# EAGLE board biglcd (EAGLE 7.7.0)
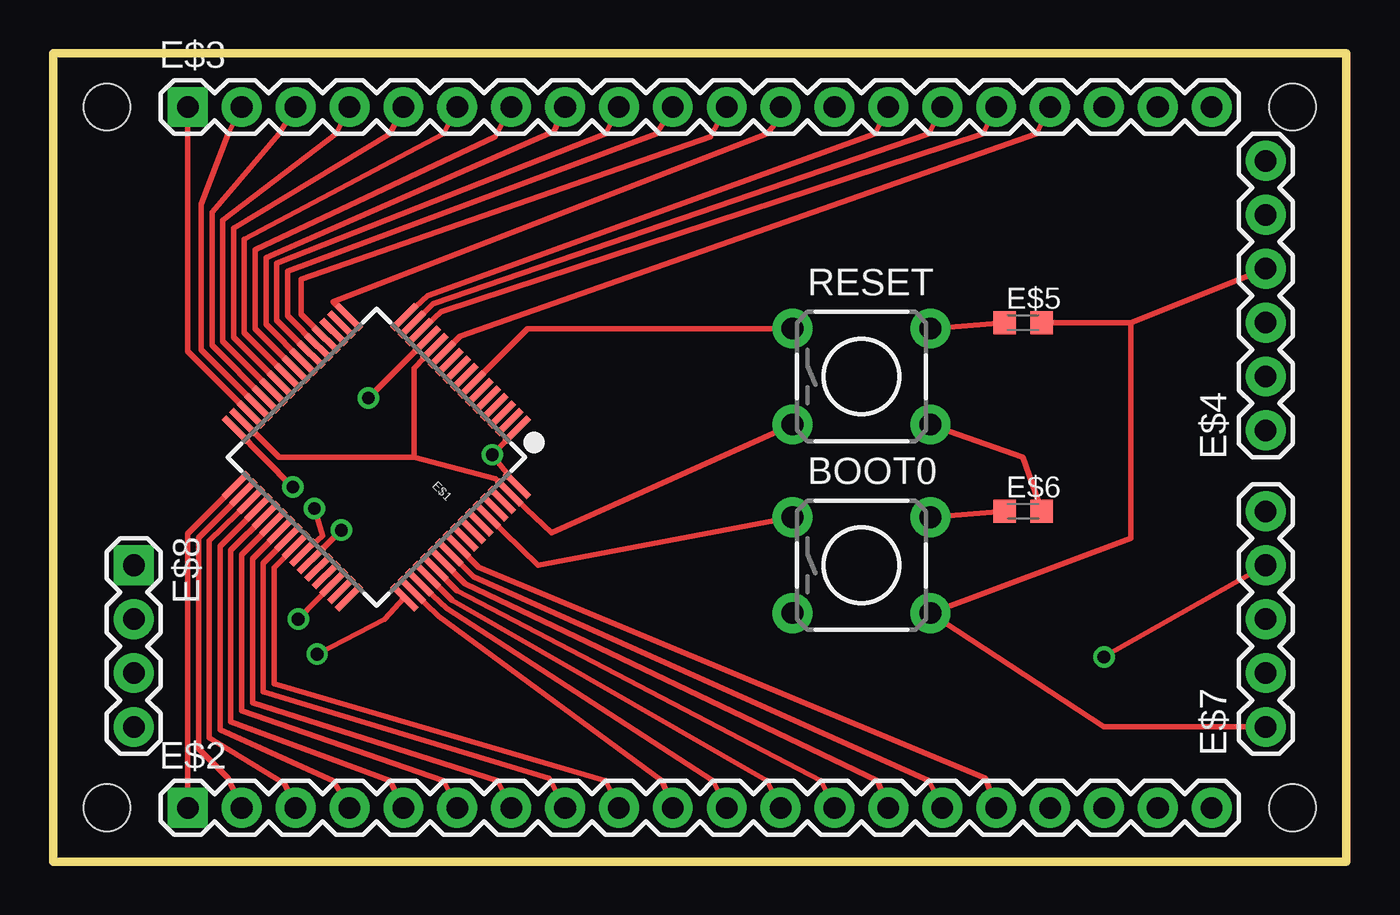
[diagram p0: board, top side]
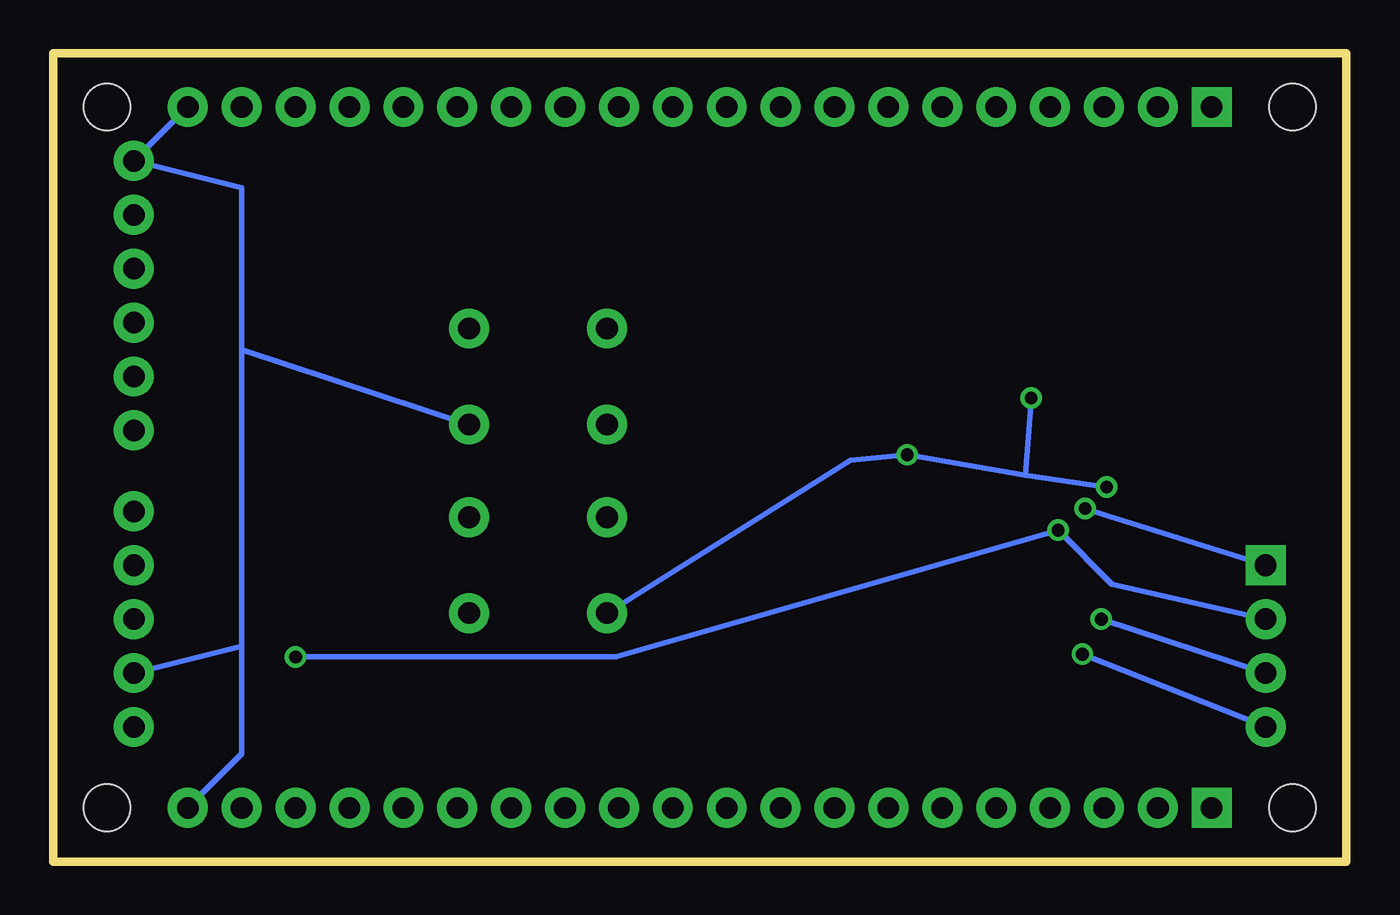
[diagram p1: board, bottom side, seen from below]

Size 60.96 x 38.1 mm. Coordinates in mm from the lower left corner, seen from the top.
Outline: 0,38.1 60.96,38.1 60.96,0 0,0 0,38.1
Copper layers (1*16): Top 0.035mm / dielectric 1.5mm / Bottom 0.035mm
Design rules "default": minimum track width 10mil, minimum drill 24mil, track to track 8mil, track to pad 8mil, pad to pad 8mil, via to via 8mil, smd to smd 8mil, copper to edge 40mil, drill to drill 8mil, minimum pad ring 10mil, minimum via ring 8mil, stop-mask expansion 4mil, vias tented up to drill 0mil, thermal gap 10mil
Holes 2.2 mm at 2.54,35.56 2.54,2.54 58.42,2.54 58.42,35.56

## Footprints (pad centres in the part's own frame; a part is rotated, then mirrored left to right if it is on the bottom)
TACTILE-PTH = drill 1.016 pad 1.88: 1 -3.251,2.261; 2 3.251,2.261; 3 -3.251,-2.261; 4 3.251,-2.261
LQFP-10X10-64 = smd 0.3 x 1.6: 1 -3.75,-5.6; 2 -3.25,-5.6; 3 -2.75,-5.6; 4 -2.25,-5.6; 5 -1.75,-5.6; 6 -1.25,-5.6; 7 -0.75,-5.6; 8 -0.25,-5.6; 9 0.25,-5.6; 10 0.75,-5.6; 11 1.25,-5.6; 12 1.75,-5.6; 13 2.25,-5.6; 14 2.75,-5.6; 15 3.25,-5.6; 16 3.75,-5.6; 33 3.75,5.6; 34 3.25,5.6; 35 2.75,5.6; 36 2.25,5.6; 37 1.75,5.6; 38 1.25,5.6; 39 0.75,5.6; 40 0.25,5.6; 41 -0.25,5.6; 42 -0.75,5.6; 43 -1.25,5.6; 44 -1.75,5.6; 45 -2.25,5.6; 46 -2.75,5.6; 47 -3.25,5.6; 48 -3.75,5.6 | smd 1.6 x 0.3: 17 5.6,-3.75; 18 5.6,-3.25; 19 5.6,-2.75; 20 5.6,-2.25; 21 5.6,-1.75; 22 5.6,-1.25; 23 5.6,-0.75; 24 5.6,-0.25; 25 5.6,0.25; 26 5.6,0.75; 27 5.6,1.25; 28 5.6,1.75; 29 5.6,2.25; 30 5.6,2.75; 31 5.6,3.25; 32 5.6,3.75; 49 -5.6,3.75; 50 -5.6,3.25; 51 -5.6,2.75; 52 -5.6,2.25; 53 -5.6,1.75; 54 -5.6,1.25; 55 -5.6,0.75; 56 -5.6,0.25; 57 -5.6,-0.25; 58 -5.6,-0.75; 59 -5.6,-1.25; 60 -5.6,-1.75; 61 -5.6,-2.25; 62 -5.6,-2.75; 63 -5.6,-3.25; 64 -5.6,-3.75
1X20 = drill 1.016 pad 1.88 square: 1 0,0 | drill 1.016 pad 1.88: 2 2.54,0; 3 5.08,0; 4 7.62,0; 5 10.16,0; 6 12.7,0; 7 15.24,0; 8 17.78,0; 9 20.32,0; 10 22.86,0; 11 25.4,0; 12 27.94,0; 13 30.48,0; 14 33.02,0; 15 35.56,0; 16 38.1,0; 17 40.64,0; 18 43.18,0; 19 45.72,0; 20 48.26,0
1X06 = drill 1.016 pad 1.88: 1 0,0; 2 2.54,0; 3 5.08,0; 4 7.62,0; 5 10.16,0; 6 12.7,0
C0603K = smd 1.05 x 1.08: 1 -0.875,0; 2 0.875,0
1X05 = drill 1.016 pad 1.88: 1 0,0; 2 2.54,0; 3 5.08,0; 4 7.62,0; 5 10.16,0
1X04 = drill 1.016 pad 1.88 square: 1 0,0 | drill 1.016 pad 1.88: 2 2.54,0; 3 5.08,0; 4 7.62,0

## Placement (x,y rotation side)
BOOT0  [TACTILE-PTH]  38.1,13.97 0 top
E$1  [LQFP-10X10-64]  15.24,19.05 135 top
E$2  [1X20]  6.35,2.54 0 top
E$3  [1X20]  6.35,35.56 0 top
E$4  [1X06]  57.15,20.32 90 top
E$5  [C0603K]  45.72,25.4 0 top
E$6  [C0603K]  45.72,16.51 0 top
E$7  [1X05]  57.15,6.35 90 top
E$8  [1X04]  3.81,13.97 270 top
RESET  [TACTILE-PTH]  38.1,22.86 0 top

## Library data of the parts
BOOT0 RESET = SparkFun-Electromechanical
E$1 = SparkFun-DigitalIC
E$2-E$4 E$7 E$8 = SparkFun-Connectors
E$5 E$6 = resistor

## Nets
S$2: E$1.35 E$2.3
S$3: E$1.16 E$3.14
S$5: E$1.14 E$3.16
S$6: E$1.30 E$3.1
S$7: E$1.15 E$3.15
S$8: E$1.28 E$3.3
S$9: E$1.27 E$3.4
S$11: E$1.34 E$2.2
S$13: E$1.26 E$3.5
S$14: E$1.25 E$3.6
S$15: E$1.33 E$2.1
S$16: E$1.24 E$3.7
S$17: E$1.23 E$3.8
S$18: E$1.22 E$3.9
S$19: E$1.21 E$3.10
S$20: E$1.20 E$3.11
S$21: E$1.17 E$3.12
S$22: E$1.41 E$2.9
S$23: E$1.11 E$3.17
S$25: E$1.51 E$2.11
S$26: E$1.50 E$2.10
S$27: E$1.43 E$7.4 E$8.2
S$28: E$1.36 E$2.4
S$29: E$1.37 E$2.5
S$30: E$1.38 E$2.6
S$31: E$1.39 E$2.7
S$33: E$1.40 E$2.8
S$35: BOOT0.4 E$4.4 E$5.2 E$7.1
S$36: BOOT0.3 E$1.1 E$1.13 E$1.32 E$1.64
S$37: E$1.29 E$3.2
S$38: E$1.7 RESET.1
S$39: E$1.52 E$2.12
S$40: E$1.53 E$2.13
S$41: E$1.54 E$2.14
S$42: E$1.55 E$2.15
S$43: E$1.56 E$2.16
S$44: E$2.17
S$45: BOOT0.1 E$1.60
S$46: E$5.1 RESET.2
S$47: E$1.12 E$1.31 E$1.63 RESET.3
S$48: BOOT0.2 E$6.1
S$49: E$1.42 E$8.1
S$50: E$2.20 E$3.20 E$4.6 E$6.2 E$7.2 RESET.4
S$51: E$1.46 E$8.3
S$52: E$1.49 E$8.4

## Tracks (layer width: path | path; a pad name or v marks a point on that pad's centre or on a via)
S$2
  Top 0.254: E$1.35 7.37,15.11 7.37,5.84 10.92,3.68 E$2.3
S$3
  Top 0.254: E$3.14 38.73,34.29 17.65,26.67 E$1.16
S$5
  Top 0.254: E$1.14 18.29,25.91 43.81,34.29 E$3.16
S$6
  Top 0.254: E$3.1 6.35,24.05 E$1.30
S$7
  Top 0.254: E$3.15 41.27,34.29 17.91,26.29 E$1.15
S$8
  Top 0.254: E$3.3 10.67,34.29 7.49,30.61 7.49,24.32 E$1.28
S$9
  Top 0.254: E$3.4 13.34,34.29 8,30.23 8,24.52 E$1.27
S$11
  Top 0.254: E$2.2 8.25,3.94 6.86,5.33 6.86,15.26 E$1.34
S$13
  Top 0.254: E$3.5 15.88,34.29 8.51,29.84 8.51,24.72 E$1.26
S$14
  Top 0.254: E$3.6 18.41,34.29 9.02,29.34 9.02,24.92 E$1.25
S$15
  Top 0.254: E$2.1 6.35,15.46 E$1.33
S$16
  Top 0.254: E$3.7 20.83,34.16 9.52,28.83 9.52,25.12 E$1.24
S$17
  Top 0.254: E$3.8 23.62,34.42 10.03,28.45 10.03,25.32 E$1.23
S$18
  Top 0.254: E$3.9 26.03,34.29 10.54,28.19 10.54,25.52 E$1.22
S$19
  Top 0.254: E$3.10 28.45,34.29 11.05,27.81 11.05,25.72 E$1.21
S$20
  Top 0.254: E$3.11 30.99,34.16 11.68,27.43 11.68,25.79 E$1.20
S$21
  Top 0.254: E$3.12 34.29,35.05 33.66,34.29 13.21,26.38 E$1.17
S$22
  Top 0.254: E$2.9 26.03,3.81 10.41,8.38 10.41,13.84 E$1.41
S$23
  Top 0.254: E$3.17 46.35,34.29 19.18,24.77 E$1.11
S$25
  Top 0.254: E$1.51 18.54,11.94 31.12,3.81 E$2.11
S$26
  Top 0.254: E$1.50 18.16,11.56 28.7,3.81 E$2.10
S$27  (via drill 0.6)
  Top 0.254: E$1.43 v13.59,15.62 | v49.53,9.65 E$7.4
  Bottom 0.254: v49.53,9.65 34.42,9.65 v13.59,15.62 11.05,13.08 E$8.2
S$28
  Top 0.254: E$2.4 13.21,3.81 7.87,6.22 7.87,14.87 E$1.36
S$29
  Top 0.254: E$2.5 15.88,3.81 8.38,6.6 8.38,14.67 E$1.37
S$30
  Top 0.254: E$2.6 18.41,3.81 8.89,7.11 8.89,14.47 E$1.38
S$31
  Top 0.254: E$2.7 20.95,3.81 9.4,7.49 9.4,14.27 E$1.39
S$33
  Top 0.254: E$2.8 23.37,3.94 9.91,8 9.91,14.07 E$1.40
S$35
  Top 0.254: E$5.2 50.8,25.4 | 50.8,25.4 E$4.4 | 50.8,25.4 50.8,15.24 BOOT0.4 49.53,6.35 E$7.1
S$36  (via drill 0.6)
  Top 0.254: E$1.13 v14.86,21.84 | E$1.64 v20.7,19.18 E$1.1 | E$1.32 v11.3,17.65
  Bottom 0.254: 15.13,18.2 v20.7,19.18 23.37,18.92 BOOT0.3 | v14.86,21.84 15.13,18.2 | v11.3,17.65 15.13,18.2
S$37
  Top 0.254: 8.89,35.48 E$3.2 8.25,34.29 6.98,30.99 6.98,24.12 E$1.29
S$38
  Top 0.254: RESET.1 22.37,25.12 E$1.7
S$39
  Top 0.254: E$2.12 33.66,3.81 18.8,12.31 E$1.52
S$40
  Top 0.254: E$2.13 36.2,3.81 19.05,12.77 E$1.53
S$41
  Top 0.254: E$2.14 38.86,3.81 19.43,13.09 E$1.54
S$42
  Top 0.254: E$2.15 41.27,3.81 19.81,13.42 E$1.55
S$43
  Top 0.254: E$2.16 43.94,3.94 20.07,13.87 E$1.56
S$44
  Top 0.254: E$2.17 46.78,2.54
S$45
  Top 0.254: E$1.60 22.86,13.97 BOOT0.1
S$46
  Top 0.254: RESET.2 E$5.1
S$47
  Top 0.254: E$1.12 17.02,23.24 17.02,19.05 | 17.02,19.05 20.85,18.03 E$1.63 23.49,15.49 RESET.3 | E$1.31 9.01,20.71 10.67,19.05 17.02,19.05
S$48
  Top 0.254: BOOT0.2 E$6.1
S$49  (via drill 0.6)
  Top 0.254: E$1.42 12.7,15.37 v12.32,16.64
  Bottom 0.254: v12.32,16.64 E$8.1
S$50
  Top 0.254: E$6.2 45.72,19.05 RESET.4
  Bottom 0.254: E$3.20 E$4.6 52.07,31.75 52.07,24.13 | E$7.2 52.07,10.16 | 52.07,10.16 52.07,24.13 | RESET.4 52.07,24.13 | E$2.20 52.07,5.08 52.07,10.16
S$51  (via drill 0.6)
  Top 0.254: E$1.46 v11.56,11.43
  Bottom 0.254: v11.56,11.43 E$8.3
S$52  (via drill 0.6)
  Top 0.254: E$1.49 15.62,11.43 v12.45,9.78
  Bottom 0.254: v12.45,9.78 E$8.4